# Altium PCB PCB1.PcbDoc
Units mm, origin at the board's own origin, x right, y up, seen from the top; angles counter-clockwise.
Board outline 56.52 x 40.01 mm, 2 copper layers (Top Layer, Bottom Layer); 41 components, 39 nets, 148 pads, 12 vias.
Unrouted connection lines stored in the file: 8.
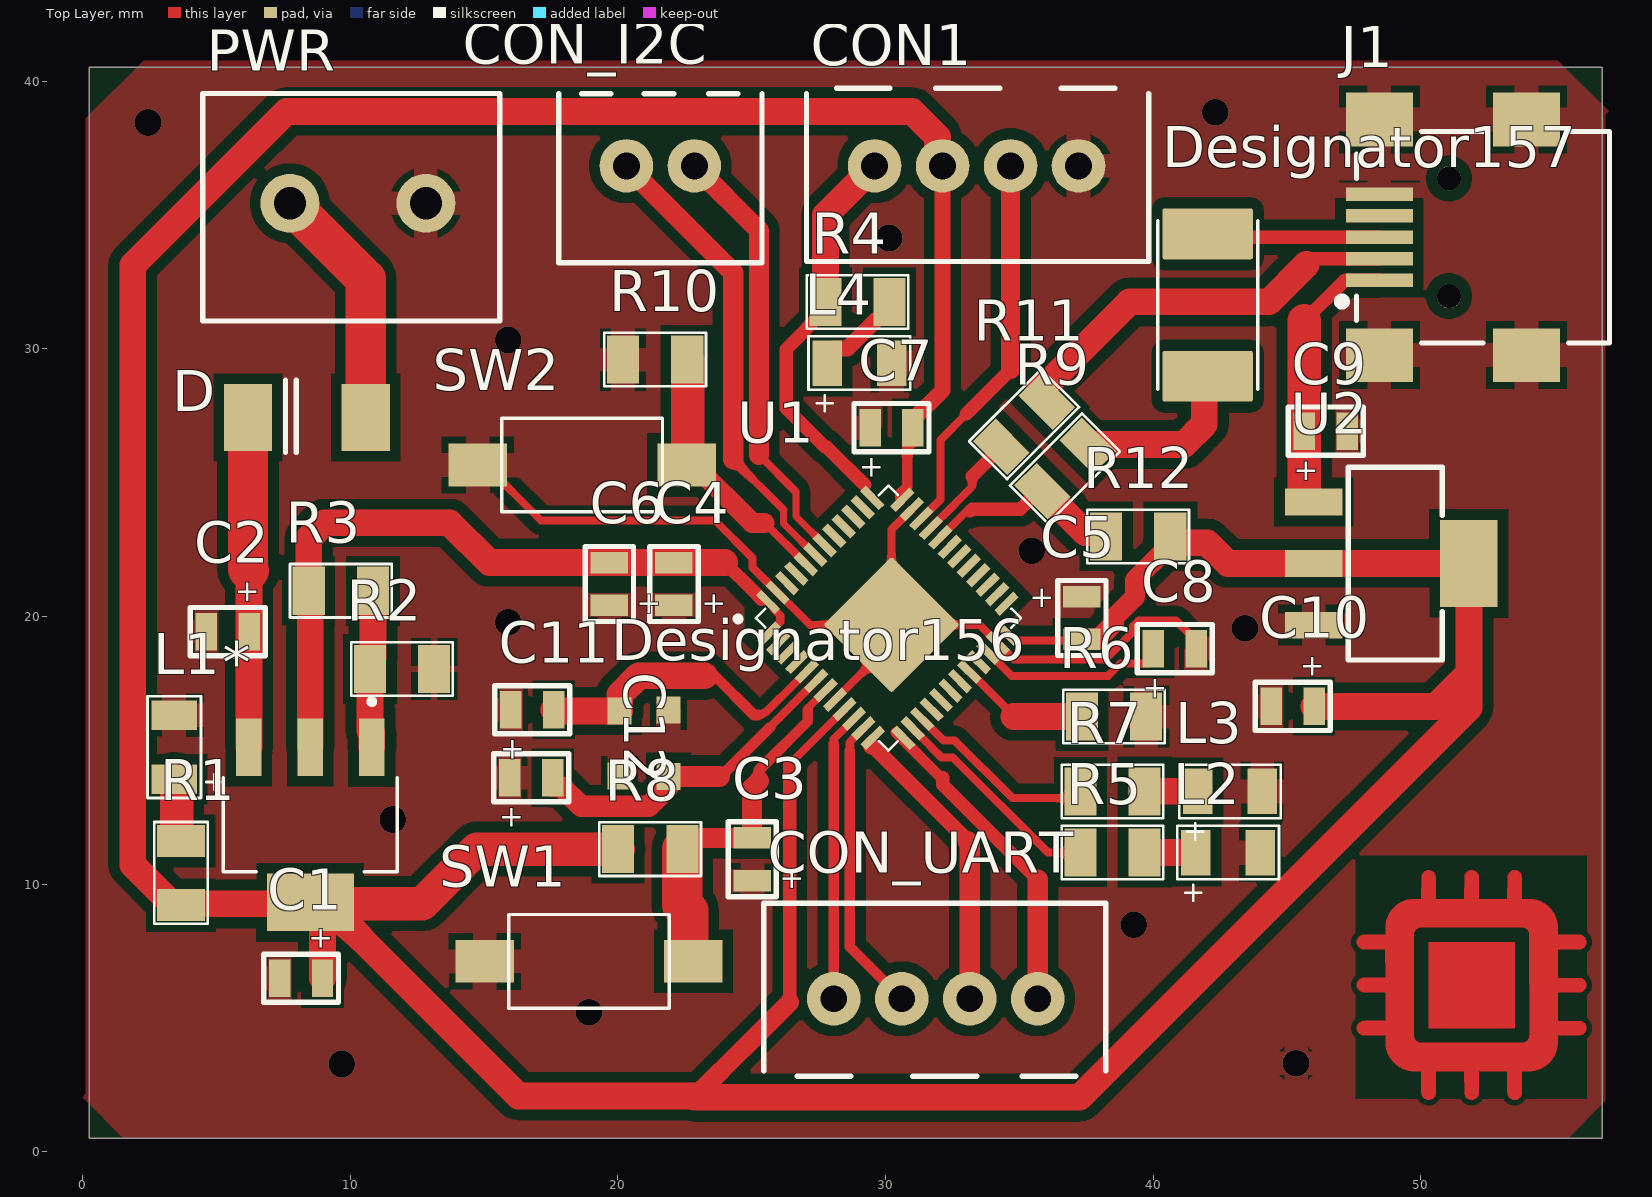
[diagram p0: Top Layer view]
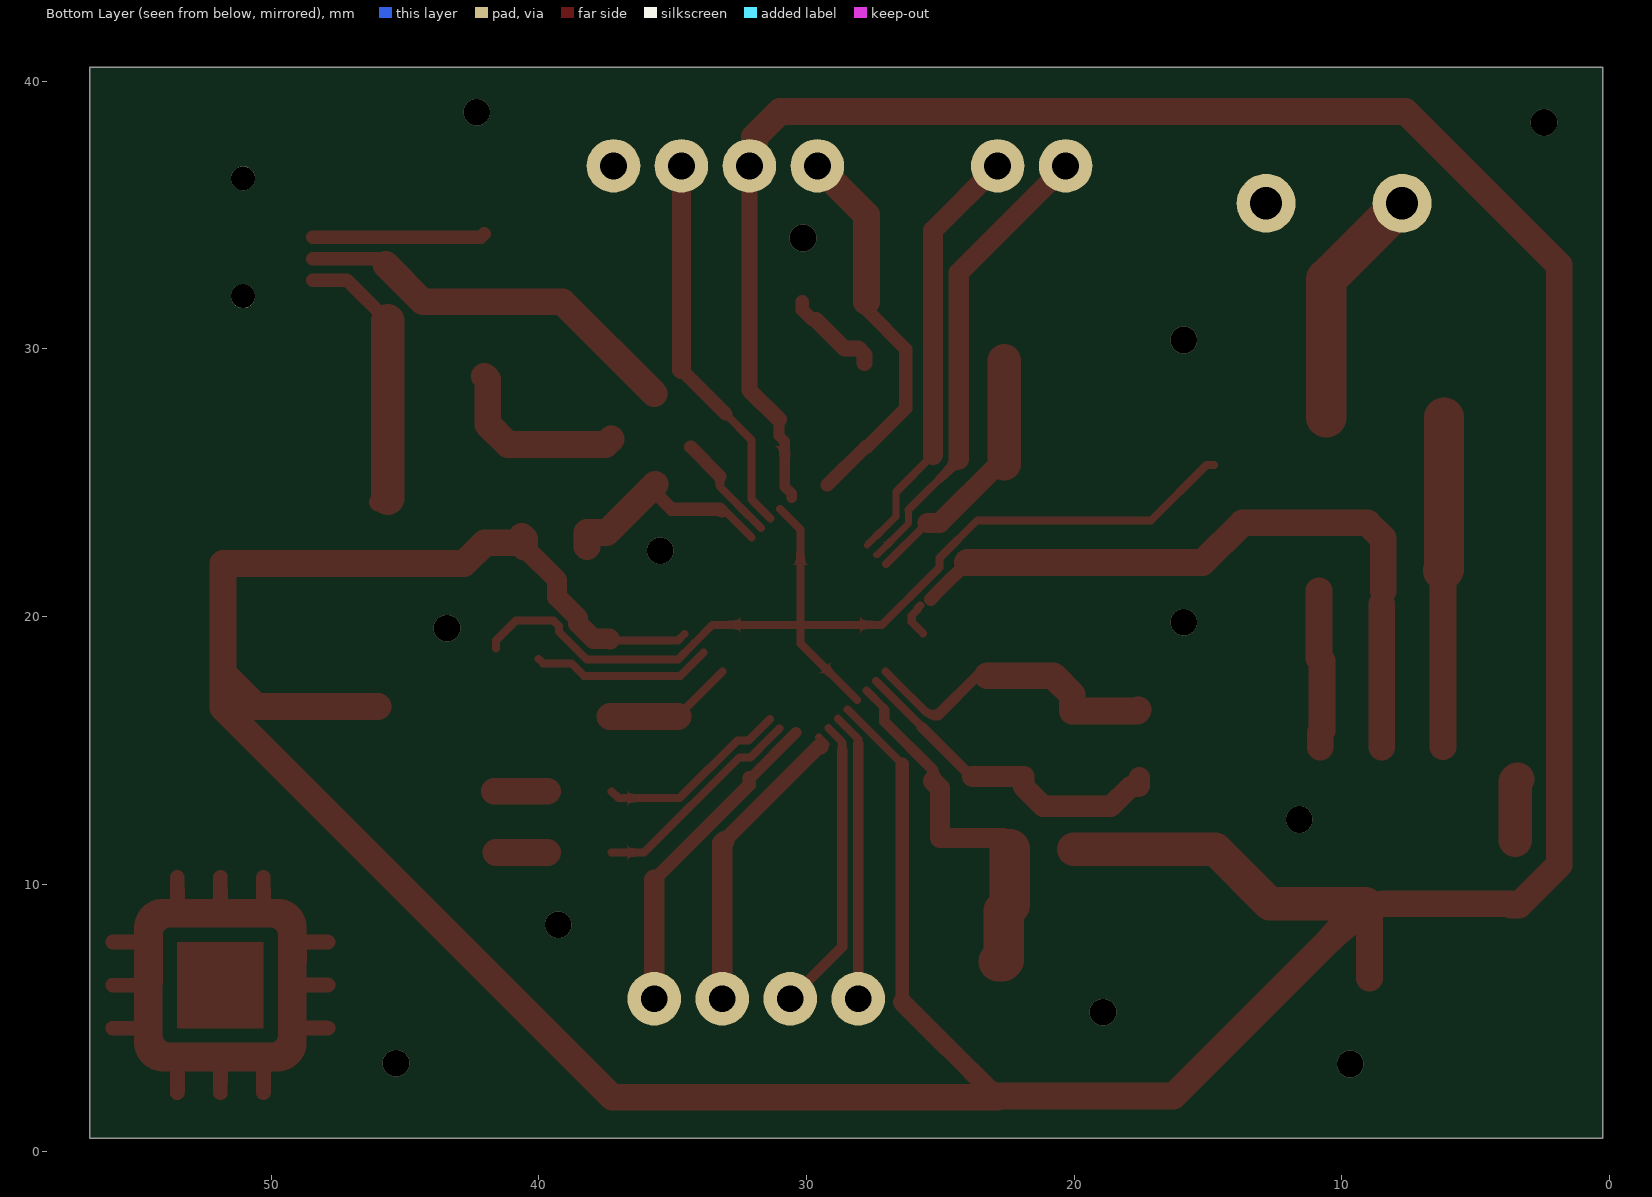
[diagram p1: Bottom Layer view, seen from below]
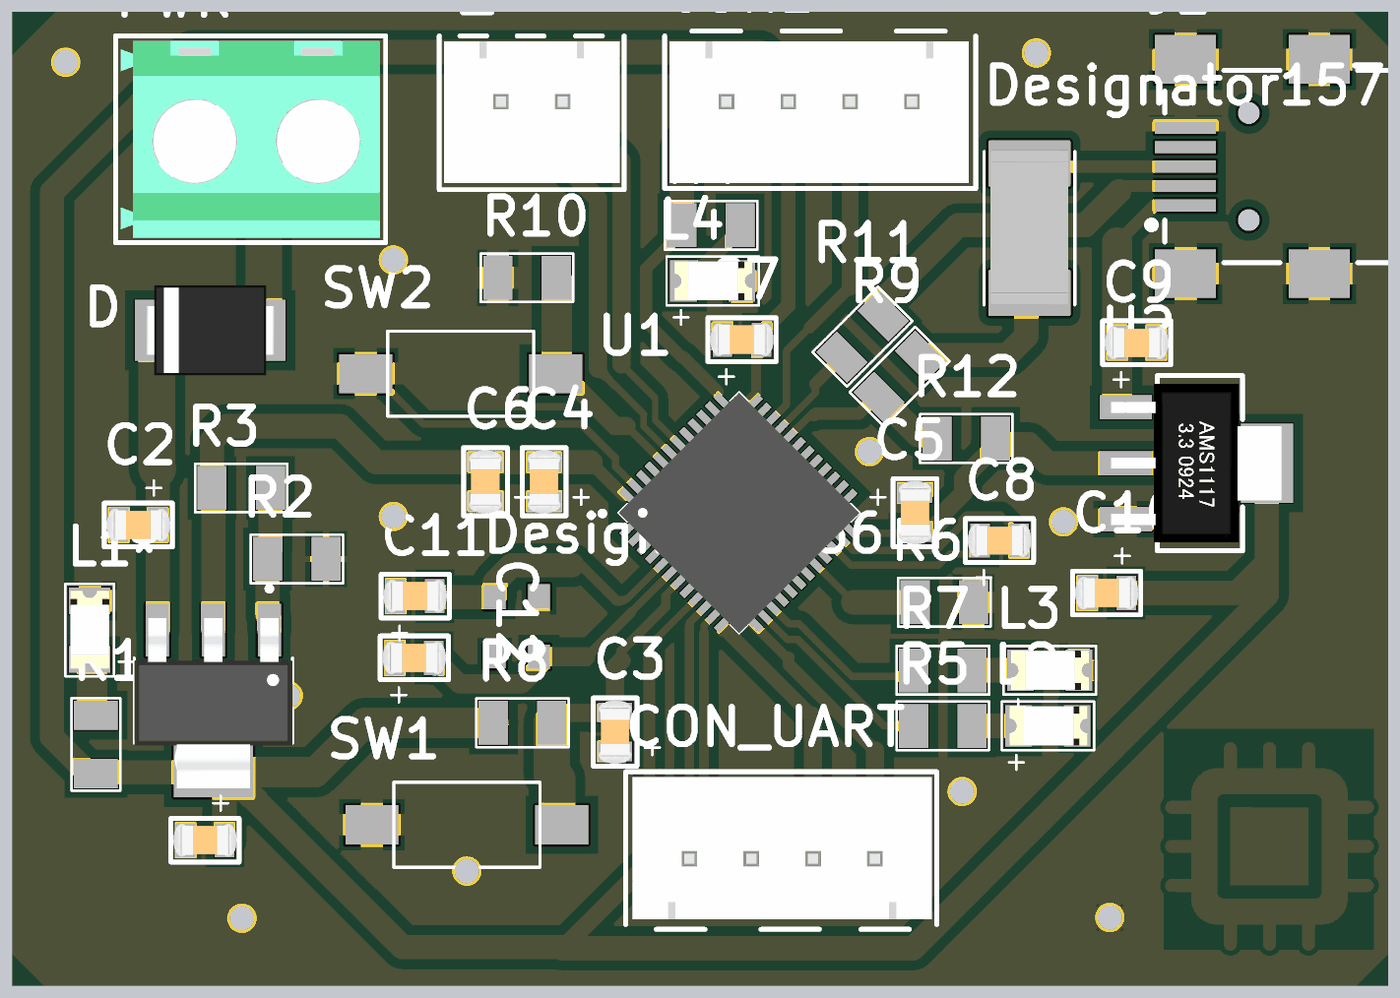
[diagram p2: 3D render of the assembled board from above, using the file's embedded part models]

## Layer stack, top to bottom
Top Solder: solder mask 0.0102, Solder Resist, Dk 3.5
Top Layer: signal copper 0.0356
Dielectric 1: dielectric 0.32, FR-4, Dk 4.8
Bottom Layer: signal copper 0.0356
Bottom Solder: solder mask 0.0102, Solder Resist, Dk 3.5

## Board outline
0.254,0.508 0.254,40.513 56.769,40.513 56.769,0.508

## Design rules (kind name [scope] priority, off if disabled: settings)
Clearance [All] p1: gap=0.2 ignorepadtopadclearanceinfootprint=FALSE except(0.4: Arc-Poly Track-Poly SMDPad-Poly THPad-Poly Via-Poly Fill-Poly Poly-Poly)
PolygonConnect [All] p1: connectstyle=Relief reliefconductorwidth=0.9 reliefentries=4 polygonreliefangle="90 Angle" airgapwidth=0.254
RoutingVias [All] p1: holewidth=0.711 width=1.27 viastyle="Through Hole" minholewidth=0.711 minwidth=1.27 maxholewidth=0.711 maxwidth=1.27
SolderMaskExpansion [All] p1: expansion=0.102 istentingtop=FALSE
Width [All] p1: maxlimit=2 minlimit=0.254 preferedwidth=0.254
30 further rules are at their usual default settings.

## Components (designator, comment, footprint, x,y, rotation, side; value= is the part's Value field where it differs from the comment)
* "LM317DCYR" SOT230P700X180-4N 8.509,12.213 r270 top
C1 "100nF" CAP_805 8.166,6.477 r180 top
C2 "100nF" CAP_805 5.423,19.431 r180 top
C3 "CAP 1uF" CAP_805 25.019,10.922 r90 top
C4 "100nF" CAP_805 22.098,21.209 r90 top
C5 "100nF" CAP_805 37.338,19.939 r270 top
C6 "100nF" CAP_805 19.685,21.209 r90 top
C7 "100nF" CAP_805 30.226,27.051 r0 top
C8 "CAP 1uF" CAP_805 40.805,18.796 r0 top
C9 "CAP 1uF" CAP_805 46.444,26.924 r0 top
C10 "CAP 1uF" CAP_805 45.212,16.637 r180 top
C11 "CAP 0.1uF" CAP_805 16.802,16.51 r0 top
C12 "CAP 1uF" CAP_805 16.764,13.97 r0 top
CON1 "4 PIN CON" "4 PIN 2.54MM" 33.401,36.83 r180 top
CON_I2C "2 PIN KON" "2 PIN 2.54MM" 21.59,36.83 r180 top
CON_UART "4 PIN CON" "4 PIN 2.54MM" 31.877,5.715 r0 top
D "S3M Diyot" DO214AA 8.382,27.432 r180 top
Designator156 "Comment" kristal 20.828,14.097 r90 top
Designator157 "Comment" RESC6331X70N 42.037,31.63 r90 top
J1 "USB 2.0" 65100516121 52.324,34.163 r90 top
L1 "Led Red" "Led 1206" 3.429,15.113 r90 top
L2 "Led Red" "Led 1206" 42.799,11.176 r0 top
L3 "Led Red" "Led 1206" 42.869,13.462 r0 top
L4 "Led Red" "Led 1206" 29.026,29.464 r0 top
PWR "2 Pin Klemens" "5.08mm-2 pin" 10.287,35.433 r0 top
R1 "220R" RES_1206 3.683,10.414 r90 top
R2 "200R" RES_1206 11.938,18.034 r0 top
R3 "120R" RES_1206 9.652,20.955 r0 top
R4 "RES 100R 1206" RES_1206 28.956,31.75 r180 top
R5 "RES 100R 1206" RES_1206 38.481,11.176 r180 top
R6 "RES 100R 1206" RES_1206 38.538,16.256 r0 top
R7 "RES 100R 1206" RES_1206 38.481,13.462 r180 top
R8 "RES 1K 1206" RES_1206 21.209,11.303 r180 top
R9 "10R" RES_1206 36.703,25.527 r225 top
R10 "RES 1K 1206" RES_1206 21.393,29.591 r180 top
R11 "10R" RES_1206 35.179,27.178 r225 top
R12 "10R" RES_1206 39.44,22.987 r0 top
SW1 "1437566-3" SW_1437566-3 18.923,7.112 r0 top
SW2 "1437566-3" SW_1437566-3 18.669,25.654 r0 top
U1 "STM32F401CCU6" UFQFPN48 30.106,19.932 r45 top
U2 "AMS1117" AMS1117 48.895,21.971 r270 top

## Footprints (in the part's own frame and the unit in brackets; to place one, negate y for a bottom-side part, rotate by r counter-clockwise, add the part's x,y. Pads: shape width x height; smd on the part's side, far side on the other; paste and mask are expansions set on the pad)
"2 PIN 2.54MM" [mm]
  round 2 hole 1 mask+0.05: 1(-1.27,0) 2(1.27,0)
  silkscreen extent -3.79,-2.7 3.8,3.62, body extent -3.61,-2.49 3.61,3.35, height 7.21
"4 PIN 2.54MM" [mm]
  round 2 hole 1 mask+0.05: 1(-3.81,0) 2(-1.27,0) 3(1.27,0) 4(3.81,0)
  silkscreen extent -6.43,-2.9 6.35,3.57, body extent -6.15,-2.49 6.15,3.35, height 7.21
"5.08mm-2 pin" [mm]
  round 2.2 hole 1.2 mask+0.05: 1(-2.54,0) 2(2.54,0)
  silkscreen extent -5.8,-4.4 5.3,4.1, body extent -5.59,-4.2 5.07,3.9, height 10.2
65100516121 [mm]
  rect 0.5x2.5 smd: 1(-1.6,3.875) 2(-0.8,3.875) 3(0,3.875) 4(0.8,3.875) 5(1.6,3.875)
  rect 2x2.5 smd: S1(-4.4,3.875) S2(4.4,3.875) S3(4.4,-1.625) S4(-4.4,-1.625)
  round 0.9 hole 0.9 unplated: ""(-2.2,1.275) ""(2.2,1.275)
  silkscreen extent -3.95,-4.72 3.95,5.37
AMS1117 [mm]
  rect 1x2.15 smd mask+0.05: 1(-2.3,-2.9) 2(0,-2.9) 3(2.3,-2.9)
  rect 3.25x2.15 smd mask+0.05: ""(0,2.9)
  silkscreen extent -3.6,-1.6 3.6,1.9, body extent -3.25,-3.5 3.25,3.5, height 1.85
CAP_805 [mm]
  rect 0.8x1.4 smd mask+0.05: 1(-0.8,0) 2(0.8,0)
  silkscreen extent -1.4,-0.9 1.4,0.9, body extent -1.3,-0.68 1.3,0.68, height 0.9
DO214AA [mm]
  rect 1.8x2.5 smd mask+0.05: 1(-2.2,0) 2(2.2,0)
  silkscreen extent 0.4,-1.4 0.8,1.3, body extent -2.65,-1.85 2.65,1.85, height 2.3
kristal [mm]
  rect 1x0.9 smd: 3(-0.08,-1.06) 3(-0.06,0.76) 3(2.37,0.76) 3(2.4,-1.06)
  body extent -0.44,-1.37 2.76,1.13, height 0.66
"Led 1206" [mm]
  rect 1.1x1.7 smd mask+0.05: 1(-1.2,0) 2(1.2,0)
  silkscreen extent -1.9,-1.8 1.9,1, body extent -1.59,-0.8 1.61,0.8, height 1.1
RES_1206 [mm]
  rect 1.2x1.8 smd mask+0.05: 1(-1.2,0) 2(1.2,0)
  silkscreen extent -1.9,-1 1.9,1, body extent -1.57,-0.82 1.57,0.82, height 0.53
RESC6331X70N [mm]
  rrect7% 1.9x3.37 smd: 1(-2.66,0) 2(2.66,0)
  silkscreen extent -3.15,-1.87 3.15,1.87, body extent -3.15,-1.6 3.2,1.6, height 0.58
SOT230P700X180-4N [mm]
  rect 2.15x0.95 smd: 1(-2.9,2.3) 2(-2.9,0) 3(-2.9,-2.3)
  rect 2.15x3.25 smd: 4(2.9,0)
  silkscreen extent -4.7,-3.25 1.75,3.25, body extent -3.4,-3.25 3.6,3.25, height 1.8
SW_1437566-3 [mm]
  rect 2.18x1.6 smd: 1(-3.9,0) 2(3.9,0)
  silkscreen extent -3,-1.75 3,1.75
UFQFPN48 [mm]
  rect 1x0.3 smd mask+0.05: 1(-3.565,2.75) 2(-3.565,2.25) 3(-3.565,1.75) 4(-3.565,1.25) 5(-3.565,0.75) 6(-3.565,0.25) 7(-3.565,-0.25) 8(-3.565,-0.75) 9(-3.565,-1.25) 10(-3.565,-1.75) 11(-3.565,-2.25) 12(-3.565,-2.75) 25(3.505,-2.74) 26(3.505,-2.24) 27(3.505,-1.74) 28(3.505,-1.24) 29(3.505,-0.74) 30(3.505,-0.24) 31(3.505,0.26) 32(3.505,0.76) 33(3.505,1.26) 34(3.505,1.76) 35(3.505,2.26) 36(3.505,2.76)
  rect 0.3x1 smd mask+0.05: 13(-2.77,-3.555) 14(-2.27,-3.555) 15(-1.77,-3.555) 16(-1.27,-3.555) 17(-0.77,-3.555) 18(-0.27,-3.555) 19(0.23,-3.555) 20(0.73,-3.555) 21(1.23,-3.555) 22(1.73,-3.555) 23(2.23,-3.555) 24(2.73,-3.555) 37(2.75,3.605) 38(2.25,3.605) 39(1.75,3.605) 40(1.25,3.605) 41(0.75,3.605) 42(0.25,3.605) 43(-0.25,3.605) 44(-0.75,3.605) 45(-1.25,3.605) 46(-1.75,3.605) 47(-2.25,3.605) 48(-2.75,3.605)
  rrect5% 3.6x3.6 smd mask+0.05: 49(-0.09,-0.26)
  silkscreen extent -4.09,-3.5 3.5,4.05, body extent -3.5,-3.5 3.5,3.5, height 0.6

## Part data
C1 C2 C4 C5 C6 C7 C11: library part "CAP 1uF", "0805 smd"
C3 C8 C9 C10 C12: "0805 smd"
CON1 CON_UART: "2.54mm vertical connector"
CON_I2C: "2.54 mm vertical"
D: Case/Package=DO214AA, Current=3A, Voltage=1000V
J1: "USB - mini B USB 2.0 Receptacle Connector 5 Position Surface Mount, Right Angle", Package=None, Availability="In Stock", Check_prices=https://www.snapeda.com/parts/65100516121/Wurth+Elektronik/view-part/?ref=eda, MF="WÃ¼rth Elektronik", MP=65100516121, Price=None, Purchase-URL=https://pricing.snapeda.com/search/part/65100516121/?ref=eda, SnapEDA_Link=https://www.snapeda.com/parts/65100516121/Wurth+Elektronik/view-part/?ref=snap
PWR: "5.08mm 2 pin klemens"
R1 R2 R3: library part "RES 100R 1206"
R9 R11 R12: library part "RES 1K 1206"
SW1 SW2: "Switch Tactile OFF (ON) SPST Rectangular Button Gull Wing 0.05A 12VDC SMD Loose Piece", Package=None, Availability=Unavailable, MP=1437566-3, Price=None
U2: "3V3 Voltage Regulator", Case/Package=SOT-89, Vmax=12V, Iout=1A

## Via types
v1: diameter 1, hole 1, Top Layer to Bottom Layer, 12 vias

## Nets (pads, with @x,y where several pads share a name; then routed paths per layer and width w, separated by ;. In a path a pad name is that pad's centre, name@x,y a point inside that pad or via, vN(x,y) a via of type N, cw(c..) or ccw(c..) an arc to the next point about the centre after c; other vN are vias at no path point)
+3V3: *.2 *.4 C1.1 C4.2 C5.2 C6.2 C7.2 C10.1 CON1.3 R1.1 R3.1 R8.2 R12.2 U1.1 U1.9 U1.24 U1.36 U1.48 U2. U2.2 | length 218.5
  Top Layer w0.3: *.4 9.059,9.313 *.4@9.101,9.271 ; U1.1 26.068,19.784 26.068,20.033 25.86,20.241 25.86,20.29 U1.48@25.75,20.399 ; 26.416,14.475 U1.9 ; U1.24 34.797,19.102 37.301,19.102 C5.2
  Top Layer w0.4: U1.36@30.556,24.437 30.556,24.587 30.809,24.84 30.809,26.534 31.026,26.751 C7.2 C7.2@31.026,27.351
  Top Layer w0.5: 23.999,22.009 25.056,20.952 U1.48@25.362,20.645 ; 26.416,5.588 26.416,14.475
  Top Layer w0.6: C7.2@31.026,27.351 32.131,28.456 CON1.3
  Top Layer w0.7: 22.86,2.032 22.909,2.081 26.416,5.588
  Top Layer w0.75: C5.2 37.363,19.164 37.96,19.164 38.53,19.734 38.53,19.941 39.314,20.725 39.314,21.361 R12.2@40.54,22.587
  Top Layer w1: R1.1 3.383,9.214 1.879,10.718 1.879,33.121 7.62,38.862 30.988,38.862 31.94,37.91 31.94,37.021 CON1.3 ; R1.1@3.683,9.264 *.4@8.46,9.264 ; R3.1 8.452,22.909 9.038,23.495 13.716,23.495 15.202,22.009 C6.2 C4.2 23.999,22.009 ; *.2 R3.1@8.509,20.458 ; C1.1 *.4@8.966,8.856 ; *.4@9.101,9.271 16.291,2.081 22.909,2.081 ; 22.86,2.032 37.245,2.032 51.795,16.582 51.795,17.886 ; R12.2@40.54,22.587 40.54,22.887 R12.2 ; R12.2@40.74,22.748 42.022,22.748 42.799,21.971 U2.2 U2. 51.795,17.886 ; C10.1 50.546,16.637 51.795,17.886
  Top Layer w1.25: *.4@9.101,9.271 12.7,9.271 14.732,11.303 R8.2
+12V: D.1 PWR.1 | length 9.2
  Top Layer w1.5: PWR.1 10.582,32.598 D.1
BOOT0: R10.1 SW2.2 U1.44 | length 10
  Top Layer w0.3: 25.483,23.495 U1.44
  Top Layer w0.75: R10.1@22.546,29.544 R10.1 ; SW2.2@22.616,25.701 SW2.2 22.859,25.654 25.018,23.495 25.483,23.495
  Top Layer w1.25: SW2.2@22.616,25.701 R10.1@22.616,29.544
BOOT1: R6.1 U1.20 | length 4.9
  Top Layer w0.3: U1.20 34.798,16.273 34.798,16.256
  Top Layer w1: 34.798,16.256 R6.1
GND: C1.2 C2.2 C3.1 C4.1 C5.1 C6.1 C7.1 C8.2 C9.2 C10.2 C11.1 C12.1 CON1.1 Designator156.3@20.068,14.037 Designator156.3@21.888,16.497 J1.5 J1.S1 J1.S2 J1.S3 J1.S4 L1.2 L2.2 L3.2 L4.2 PWR.2 R2.2 R6.2 R10.2 SW1.1 SW2.1 U1.8 U1.23 U1.35 U1.47 U1.49 U2.3 | length 39.7
  Top Layer w0.3: SW2.1 15.059,25.654 17.123,23.59 23.62,23.59 25.035,22.175 25.035,21.822 U1.47 26.422,20.435 26.428,20.435 27.178,19.685 U1.49 ; U1.8 30.226,18.992 U1.49 ; U1.35 30.226,23.249 U1.49 ; C8.2 41.605,19.096 40.855,19.846 39.46,19.846 39.255,19.641 39.255,19.434 38.21,18.389 34.803,18.389 U1.23 33.507,19.685 U1.49
  other v1: 9.682,3.271 45.339,3.302 18.923,5.207 39.273,8.478 11.587,12.415 43.434,19.558 15.905,19.781 35.463,22.448 15.905,30.322 30.129,34.132 2.443,38.45 42.321,38.831
Net*_1: *.1 R2.1 R3.2 | length 5.9
  Top Layer w1: *.1 10.809,15.663 10.738,15.734 R2.1 10.738,18.334 10.852,18.448 R3.2
Net*_3: *.3 C2.1 D.2 | length 12.3
  Top Layer w1: *.3@6.223,15.127 C2.1 6.223,21.717
  Top Layer w1.5: D.2 6.182,21.758 6.223,21.717
NetC9_1: C9.1 J1.1 U2.1 | length 10.5
  Top Layer w0.5: 45.644,31.039 47.168,32.563 J1.1
  Top Layer w0.7: U2.1@45.644,24.421 45.794,24.271 U2.1
  Top Layer w1.25: U2.1@45.644,24.421 C9.1 45.644,31.039
NetCON_I2C_1: CON_I2C.1 U1.42 | length 16.2
  Top Layer w0.254: 26.639,24.669 26.662,24.646 26.662,23.73 U1.42
  Top Layer w0.3: 25.273,26.035 26.639,24.669
  Top Layer w0.75: CON_I2C.1 25.273,34.417 25.273,26.035
NetCON_I2C_2: CON_I2C.2 U1.43 | length 17.5
  Top Layer w0.254: 26.185,23.98 26.185,23.468 27.347,22.305 U1.43
  Top Layer w0.3: 24.311,25.854 26.185,23.98
  Top Layer w0.75: CON_I2C.2 24.311,32.839 24.311,25.854
NetCON_UART_1: CON_UART.1 U1.10 U1.31 | length 10.8
  Top Layer w0.3: 28.067,15.24 28.067,15.419 U1.10
  Top Layer w0.4: CON_UART.1 28.067,15.24
NetCON_UART_2: CON_UART.2 U1.11 U1.30 | length 11.1
  Top Layer w0.3: 28.667,14.983 28.667,15.312 U1.11
  Top Layer w0.4: 28.667,14.983 28.667,7.655 CON_UART.2
NetCON_UART_3: CON_UART.4 U1.13 | length 12.2
  Top Layer w0.4: U1.13@30.389,15.661 30.464,15.586 32.02,14.03 32.091,14.03 32.141,13.98
  Top Layer w0.5: 32.141,13.98 32.141,13.706 35.687,10.16
  Top Layer w0.75: CON_UART.4 35.687,10.16
NetCON_UART_4: CON_UART.3 U1.12 | length 11.3
  Top Layer w0.3: U1.12@29.282,15.22 U1.12
  Top Layer w0.56: 29.464,15.113 29.567,15.113 33.072,11.609
  Top Layer w0.75: 33.072,11.609 33.147,11.533 CON_UART.3
NetL1_1: L1.1 R1.2 | length 2.3
  Top Layer w1.25: L1.1 3.445,13.913 3.52,13.838 R1.2@3.52,11.639
NetL2_1: L2.1 R5.1 | length 1.9
  Top Layer w1: R5.1 L2.1
NetL3_1: L3.1 R7.1 | length 2
  Top Layer w1: R7.1 L3.1
NetL4_1: L4.1 R4.1 | length 3.6
  Top Layer w0.5: R4.1@29.646,31.1 29.806,31.1 30.156,31.45 R4.1
  Top Layer w0.6: L4.1 27.826,29.764 28.076,30.014 28.582,30.014 R4.1@29.646,31.078
NetLabel14: U1.45
NetLabel15: U1.46
NetLabel16: U1.40
NetLabel17: U1.29
NetLabel18: U1.21
NetLabel19: U1.25
NetLabel20: U1.26
NetLabel21: U1.27
NetLabel22: U1.28
NetR5_2: R5.2 U1.14 | length 8.2
  Top Layer w0.3: U1.14 31.324,15.504 32.096,14.732 32.512,14.732 36.068,11.176 R5.2
NetR7_2: R7.2 U1.15 | length 7.2
  Top Layer w0.3: U1.15 32.168,15.367 32.584,15.367 34.743,13.208 37.027,13.208 R7.2
NRST: C3.2 R8.1 SW1.2 U1.7 | length 14
  Top Layer w0.3: 27.094,16.496 27.094,16.567 U1.7
  Top Layer w0.4: 25.273,13.843 25.273,14.259 27.094,16.08 27.094,16.496
  Top Layer w0.75: R8.1 22.409,11.497 22.634,11.722 C3.2 25.019,13.589 25.273,13.843
  Top Layer w1.5: R8.1 22.409,9.214 22.631,8.992 22.631,7.162 22.681,7.112 SW1.2
OSC_IN: C11.2 Designator156.3@20.068,16.467 U1.5 | length 11.6
  Top Layer w0.3: 25.226,16.317 25.368,16.317 25.458,16.408 25.52,16.408 26.745,17.632 U1.5
  Top Layer w0.4: 23.241,17.78 23.622,17.78 25.085,16.317 25.226,16.317
  Top Layer w1: C11.2 17.645,16.467 20.068,16.467 20.068,17.067 20.781,17.78 23.241,17.78
OSC_OUT: C12.2 Designator156.3@21.888,14.017 U1.6 | length 12.7
  Top Layer w0.3: 25.686,15.858 25.661,15.882 25.708,15.888 26.866,17.046 U1.6
  Top Layer w0.4: 23.796,14.017 23.845,14.017 25.686,15.858
  Top Layer w0.8: C12.2 17.564,13.67 17.589,13.645 17.889,13.645 18.631,12.903 21.158,12.903 21.888,13.633 21.888,14.017 23.796,14.017
PA11: R9.2 R12.1 U1.32 | length 8.3
  Top Layer w0.3: U1.32 33.035,23.937 33.172,23.937
  Top Layer w0.5: 33.172,23.937 33.177,23.937 33.243,24.003 35.035,24.003 35.71,24.678 R9.2
  Top Layer w1: R9.2@35.66,24.932 37.459,23.133 38.197,23.133 R12.1@38.197,22.606
PA12: R11.2 U1.33 | length 4.1
  Top Layer w0.3: U1.33 32.572,24.181 32.572,24.185 33.239,24.852 33.239,25.238
  Top Layer w0.5: 33.239,25.238 R11.2
SWCLK: CON1.4 R4.2 U1.37 | length 14.5
  Top Layer w0.5: R4.2 27.756,31.45 26.289,29.983 26.289,27.78 27.725,26.344 27.79,26.344 29.226,24.908
  Top Layer w1: R4.2 27.756,34.995 CON1.4
SWDIO: CON1.2 U1.34 | length 14.6
  Top Layer w0.3: U1.34 32.05,24.365 32.05,26.589 33.02,27.559
  Top Layer w0.5: 33.02,27.559 34.671,29.21
  Top Layer w0.7: 34.671,29.21 CON1.2
USB_DN: J1.2 R11.1 | length 14.9
  Top Layer w0.5: 45.72,33.147 45.936,33.363 J1.2
  Top Layer w1: R11.1@35.687,28.321 39.116,31.75 44.323,31.75 45.72,33.147
USB_DP: Designator157.1 Designator157.2 J1.3 R9.1 | length 13.3
  Top Layer w0.5: Designator157.2 42.164,34.163 J1.3
  Top Layer w1: R9.1@37.298,26.63 37.51,26.417 41.149,26.417 41.91,27.178 41.91,28.843 Designator157.1
VCAP: C8.1 U1.22 | length 6.8
  Top Layer w0.3: U1.22 34.705,17.78 38.308,17.78 38.774,18.246 39.836,18.246 C8.1@40.005,18.415
pads on no net: J1. J1.4 U1.2 U1.3 U1.4 U1.16 U1.17 U1.18 U1.19 U1.38 U1.39 U1.41

## Polygon pours and split planes (outlines as drawn)
GND on Top Layer "GND_L01_P000" (solid, pour order 0): 0.127,38.608 2.286,40.767 55.118,40.767 57.023,38.862 56.896,38.735 56.896,1.905 55.499,0.508 1.524,0.508 0,2.032 0.127,2.159

## Other copper
Top Layer:
  region: 51.647,4.617 50.293,4.621 50.291,7.825 50.296,7.831 53.503,7.827 53.505,4.622 53.499,4.617 51.65,4.617
  region: 773 vertices and 1 holes, not listed, extent 47.612,1.938 56.184,10.51
  pour cut-out: 47.561,11.049 47.561,1.973 56.197,1.973 56.197,11.049
  pour cut-out: 24.898,19.109 24.732,19.275 24.732,20.627 25.007,20.627 25.688,19.947 25.688,19.899
  pour cut-out: 26.42,19.759 26.374,19.713 26.374,19.612 26.451,19.612 28.363,17.7 29.078,18.415 29.083,18.415 28.956,18.542 28.732,18.318 28.679,18.318 27.564,19.433 26.926,19.433 26.926,19.556 26.661,19.821 26.105,19.821 26.068,19.784 26.094,19.759
  pour cut-out: 30.777,23.228 30.65,23.101 30.583,23.101 30.583,22.242 31.496,21.329 31.496,21.082 31.598,21.082 32.995,19.685 30.36,17.05 30.36,16.943 30.047,16.943 29.368,17.622 29.368,17.562 28.896,17.091 30.075,15.911 30.075,15.941 34.032,19.897 34.108,19.897 30.777,23.228 30.65,23.101 30.583,23.101 30.583,22.242 31.773,21.052
  pour cut-out: 26.755,20.613 27.326,20.042 27.669,20.042 29.869,22.242 29.869,23.249 30.201,23.58 30.201,23.795 30.205,23.8 30.035,23.97 30.035,23.894

## Silkscreen, mask and mechanical layers (free items; w line width, h text height)
Mechanical 1:
  the board outline again, w1

## Text inside footprints (layer, text, board x,y; h text height)
C1: Top Overlay "+" at 9.366,8.31 h0.8 r180
C2: Top Overlay "+" at 6.623,21.264 h0.8 r180
C3: Top Overlay "+" at 26.852,9.722 h0.8 r90
C4: Top Overlay "+" at 23.931,20.009 h0.8 r90
C5: Top Overlay "+" at 35.505,21.139 h0.8 r270
C6: Top Overlay "+" at 21.518,20.009 h0.8 r90
C7: Top Overlay "+" at 29.026,25.218 h0.8
C8: Top Overlay "+" at 39.605,16.963 h0.8
C9: Top Overlay "+" at 45.244,25.091 h0.8
C10: Top Overlay "+" at 46.412,18.47 h0.8 r180
C11: Top Overlay "+" at 15.602,14.677 h0.8
C12: Top Overlay "+" at 15.564,12.137 h0.8